# Altium PCB PCB1.PcbDoc
Units mil, origin at the board's own origin, x right, y up, seen from the top; angles counter-clockwise.
Board outline 5155.03 x 4750.03 mil, 2 copper layers (Top Layer, Bottom Layer); 34 components, 44 nets, 159 pads, 28 vias.
Unrouted connection lines stored in the file: 3.
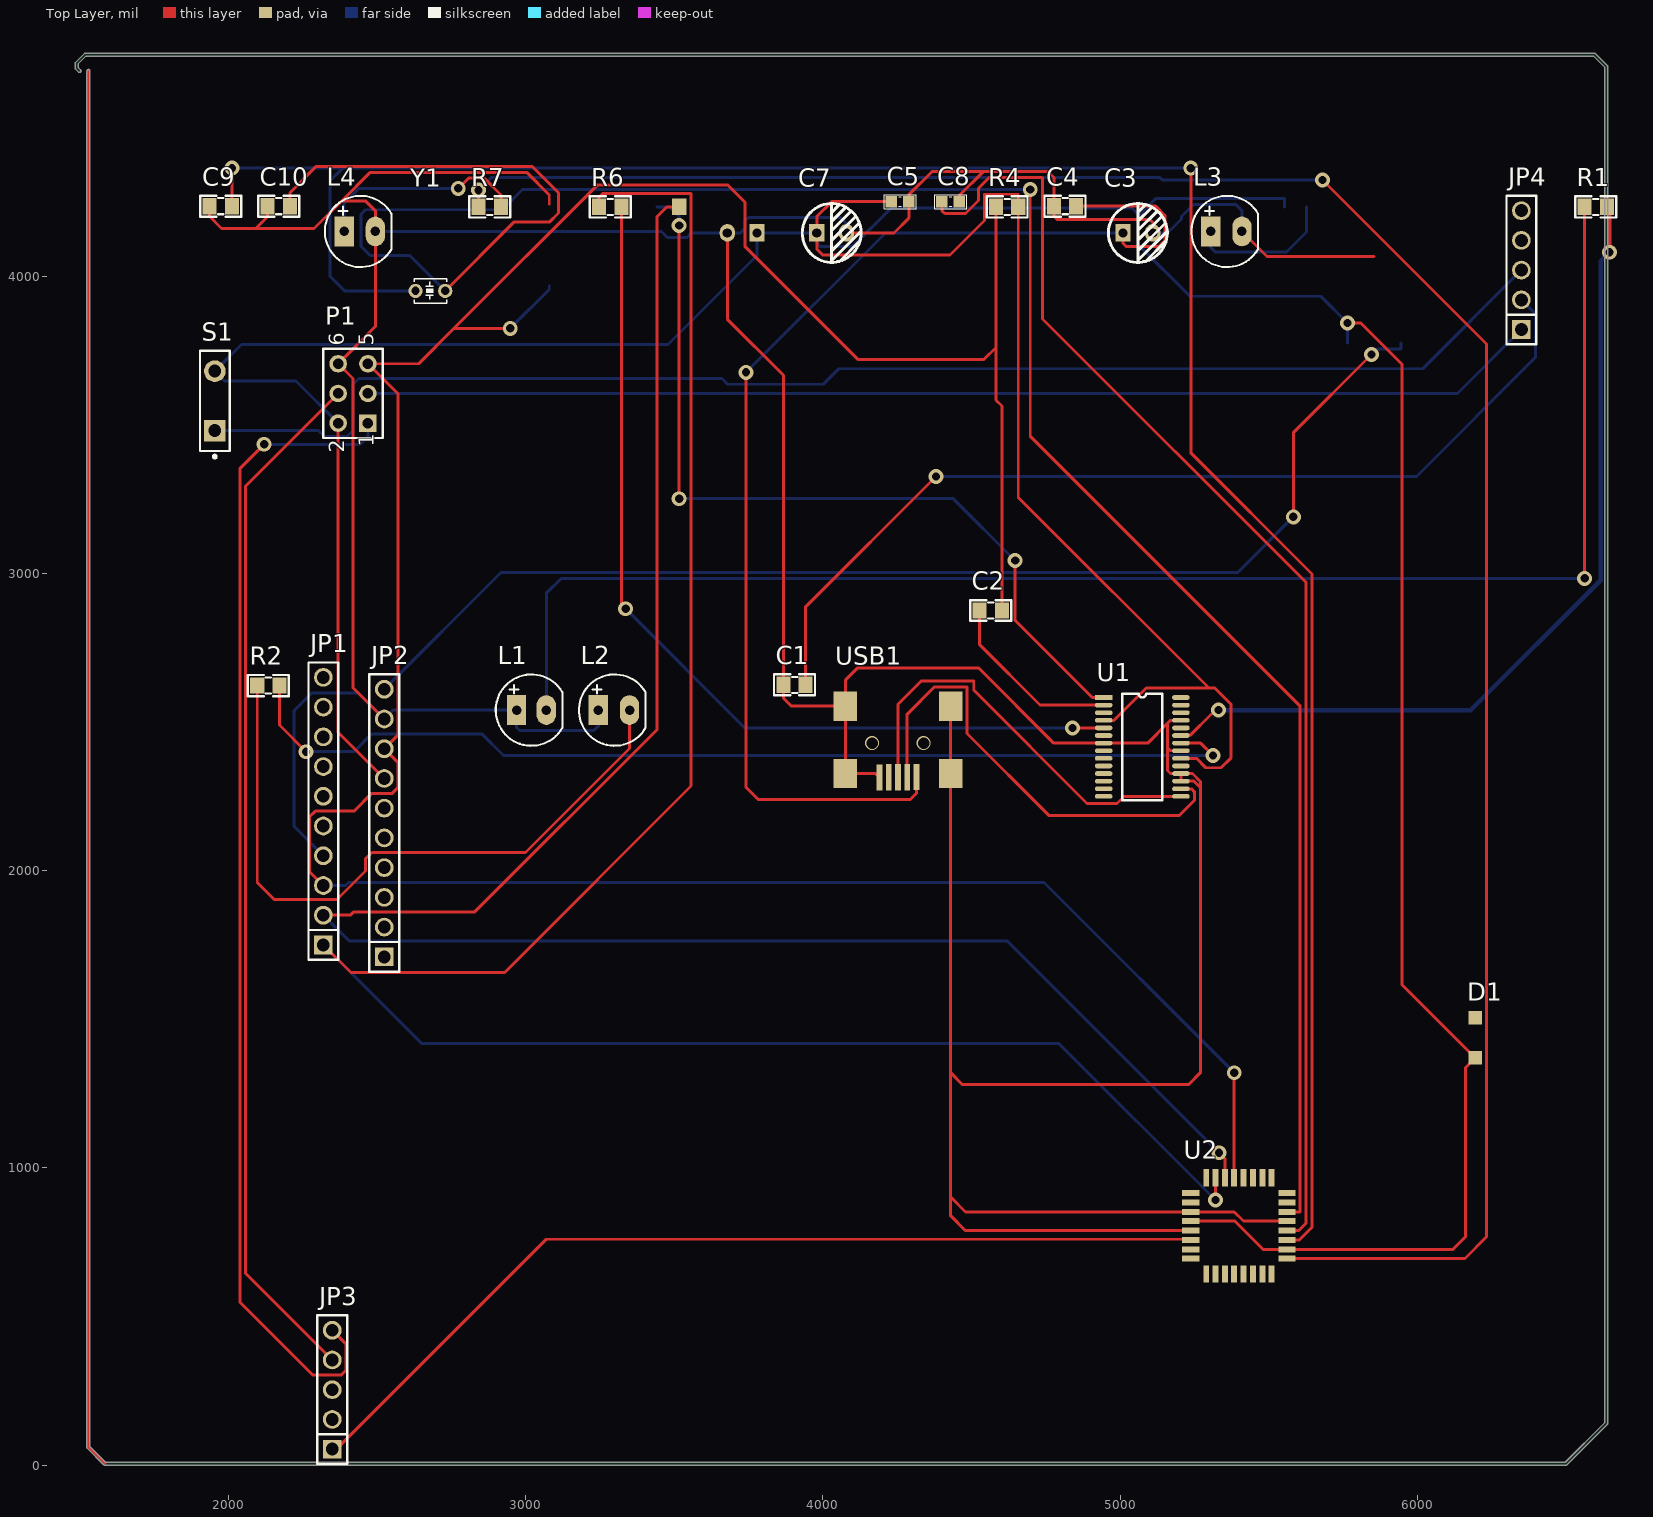
[diagram p0: Top Layer view]
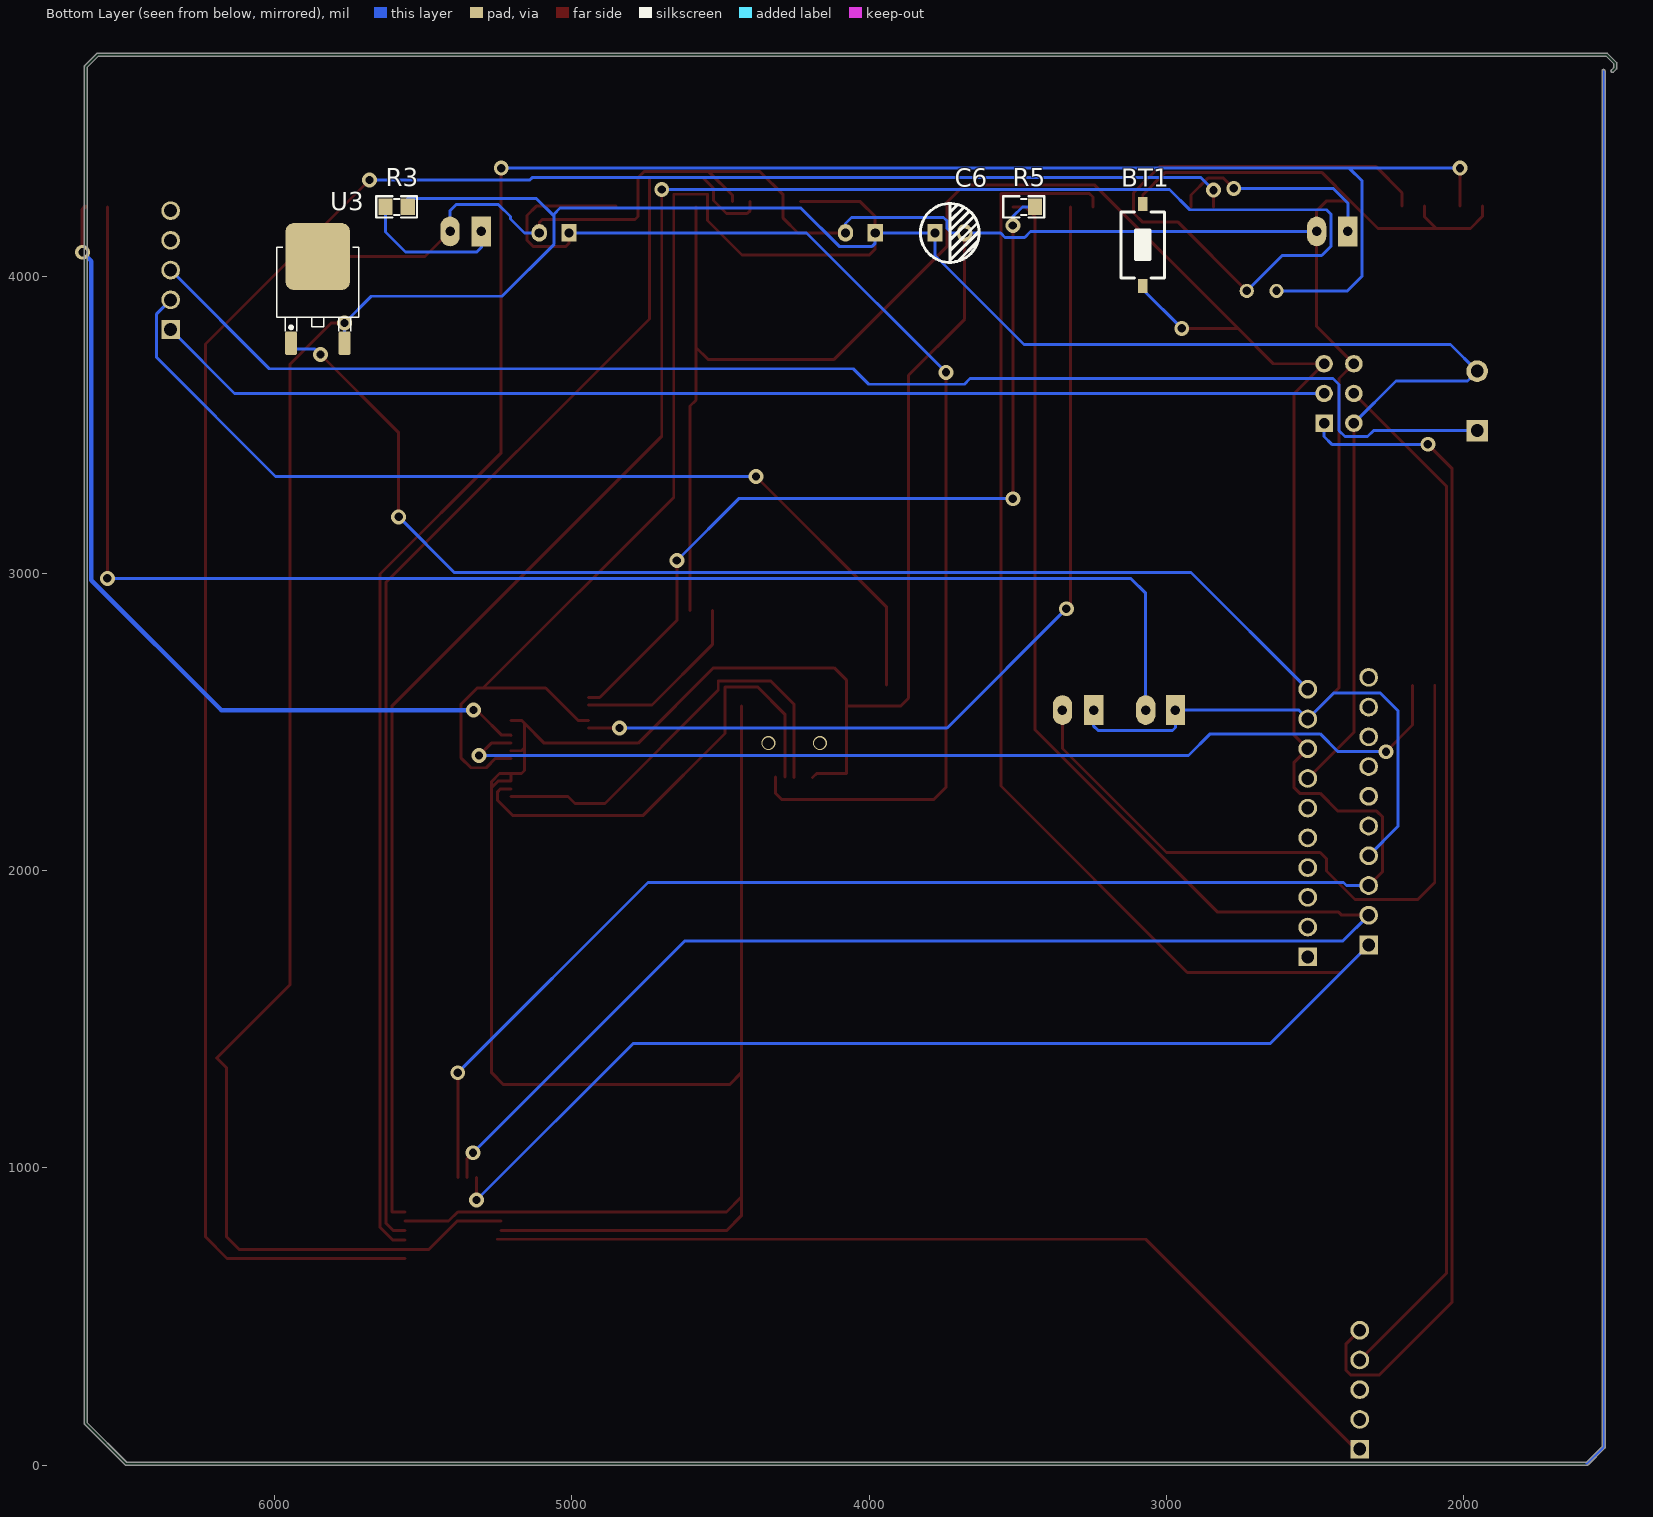
[diagram p1: Bottom Layer view, seen from below]

## Layer stack, top to bottom
Top Solder: solder mask 0.4, Solder Resist, Dk 3.5
Top Layer: signal copper 1.4
Dielectric 1: dielectric 12.6, FR-4, Dk 4.8
Bottom Layer: signal copper 1.4
Bottom Solder: solder mask 0.4, Solder Resist, Dk 3.5

## Board outline
1496.45,4686.45 1486.45,4696.45 cw(c1489.97,4699.99) 1484.98,4700 1484.98,4715 cw(c1490,4715) 1486.47,4718.56 1516.45,4748.55 cw(c1519.99,4745.03) 1520,4750.02 6595,4750.02 cw(c6595,4745) 6598.56,4748.53 6638.55,4708.55 cw(c6635.03,4705.01) 6640.02,4705 6640.02,140 cw(c6635,140) 6638.53,136.44 6503.55,1.45 cw(c6500.01,4.97) 6500,-0.01 1585,-0.01 cw(c1585,5) 1581.44,1.47 1526.45,56.45 cw(c1529.97,59.99) 1524.98,60 1524.98,4690 cw(c1530,4690) 1535.02,4690 1535.02,62.08 1587.08,10.02 6497.92,10.02 6629.98,142.08 6629.98,4702.92 6592.92,4739.98 1522.08,4739.98 1495.02,4712.92 1495.02,4702.08 1503.55,4693.55 cw(c1500,4690) 1505.02,4690 cw(c1500,4690)

## Design rules (kind name [scope] priority, off if disabled: settings)
Clearance [All] p1: gap=10 ignorepadtopadclearanceinfootprint=FALSE except(0: Arc-Hole Track-Hole SMDPad-Hole THPad-Hole Via-Hole Fill-Hole Poly-Hole Region-Hole Text-Hole)
PolygonConnect [All] p1: connectstyle=Relief reliefconductorwidth=10 reliefentries=4 polygonreliefangle="90 Angle" airgapwidth=10
RoomDefinition Sheet1 [InComponentClass('Sheet1')] p1: confinementstyle=ConfineIn formatcopy=TRUE lockcomponents=FALSE outline 7045,1060 14705,1060 14705,2180 7045,2180
RoutingVias [All] p1: holewidth=28 width=50 viastyle="Through Hole" minholewidth=28 minwidth=50 maxholewidth=28 maxwidth=50
SolderMaskExpansion [All] p1: expansion=4 istentingtop=FALSE
Width [All] p1: maxlimit=50 minlimit=10 preferedwidth=10
30 further rules are at their usual default settings.

## Components (designator, comment, footprint, x,y, rotation, side; value= is the part's Value field where it differs from the comment)
BT1 "Nut Nhan 2 Chan SMD 3x6x2.5" "Nut Nhan 2 Chan SMD 3x6x2.5" 3080,4105 r90 bottom
C1 "104" "tu 0805" 3905,2625 r0 top
C2 "104" "tu 0805" 4565,2875 r0 top
C3 "4.7uF" "tu hoa 5mm" 5060,4145 r0 top
C4 "104" "tu 0805" 4815,4235 r0 top
C5 "104" "tu 0603" 4260,4250 r0 top
C6 "4.7uF" "tu hoa 5mm" 3729.01,4145 r180 bottom
C7 "4.7uF" "tu hoa 5mm" 4030,4145 r0 top
C8 "104" "tu 0603" 4430,4250 r0 top
C9 "15pF" "tu 0805" 1975,4235 r0 top
C10 "15pF" "tu 0805" 2170,4235 r0 top
D1 "MBR0520" SOD-123 6195,1370 r90 top
JP1 "JP 1x10 2.54" "JP 1x10 DT" 2320,1750 r90 top
JP2 "JP 1x10 2.54" "JP 1x10 DT" 2525,1710 r90 top
JP3 "JP 1x5 2.54" "JP 1x5 DT" 2350,53.94 r90 top
JP4 "JP 1x5 2.54" "JP 1x5 DT" 6350,3820 r90 top
L1 "LED 5mm" LED-5MM-RED 2970,2540 r0 top
L2 "LED 5mm" LED-5MM-Green 3250,2540 r0 top
L3 "LED 5mm" LED-5MM-Green 5310,4150 r0 top
L4 "LED 5mm" LED-5MM-Green 2395,4150 r0 top
P1 "Header 3X2" HDR2X3 2470,3505 r90 top
R1 "680R" "tro smd 0805"#1 6600,4235 r0 top
R2 "680R" "tro smd 0805"#1 2135,2625 r0 top
R3 "680R" "tro smd 0805"#1 5590,4235 r180 bottom
R4 "1k" "tro smd 0805"#1 4620,4235 r0 top
R5 "1k" "tro smd 0805"#2 3480,4235 r180 bottom
R6 "1k" "tro smd 0805"#1 3285,4235 r0 top
R7 "680R" "tro smd 0805"#1 2880,4235 r0 top
S1 "SW-SPST" SPST-2 1955,3580 r90 top
U1 "FT232RL" TSSOP28 4945,2582.36 r0 top
U2 "ATMEGA168-20AU" QFP80P900X900X120-32N 5400,805 r0 top
U3 "78M05 SMD TO252" TO252 5855,3920 r180 bottom
USB1 "USB Mini 5p SMD" "USB Mini 5p SMD" 4250,2450 r0 top
Y1 "16Mhz" "Thach Anh 2 Chan 32,768 KHz" 2630,3950 r90 top value=4Mhz

## Footprints (in the part's own frame and the unit in brackets; to place one, negate y for a bottom-side part, rotate by r counter-clockwise, add the part's x,y. Pads: shape width x height; smd on the part's side, far side on the other; paste and mask are expansions set on the pad)
HDR2X3 [mm] "Connector; Header; 3x2 Position"
  rect 1.5x1.5 hole 0.9: 1(0,0)
  round 1.5 hole 0.9: 2(0,2.54) 3(2.54,0) 4(2.54,2.54) 5(5.08,0) 6(5.08,2.54)
  silkscreen extent -1.27,-1.27 6.35,3.81
"JP 1x5 DT" [mm] "5 pins, 1 row, straight, gold plating"
  rect 1.6x1.6 hole 1.1: 1(0,0)
  round 1.6 hole 1.1: 2(2.54,0) 3(5.08,0) 4(7.62,0) 5(10.16,0)
  silkscreen extent -1.27,-1.27 11.43,1.27, body extent -1.27,-1.27 11.43,1.27, height 8.54
"JP 1x10 DT" [mm] "10 pins, 1 row, straight, gold plating"
  rect 1.6x1.6 hole 1.1: 1(0,0)
  round 1.6 hole 1.1: 2(2.54,0) 3(5.08,0) 4(7.62,0) 5(10.16,0) 6(12.7,0) 7(15.24,0) 8(17.78,0) 9(20.32,0) 10(22.86,0)
  silkscreen extent -1.27,-1.27 24.13,1.27, body extent -1.27,-1.27 24.13,1.27, height 8.54
LED-5MM-Green [mil] "LED 2 PIN, 5 ly , Only colour,pin to pin 100mil"
  rect 65x100 hole 32: 1(-5,0)
  oval 65x100 hole 32: 2(100,0)
  silkscreen extent -70,-120 154,120, body extent -69,-120 145,117, height 339
LED-5MM-RED [mil] "LED 2 PIN, 5 ly , Only colour,pin to pin 100mil"
  rect 65x100 hole 32: 1(0,0)
  oval 65x100 hole 32: 2(100,0)
  silkscreen extent -70,-120 154,120, body extent -65,-119 149,118, height 339
"Nut Nhan 2 Chan SMD 3x6x2.5" [mm] "Switch SMD type"
  rect 1.2x0.8 smd: 1(-3.5,0) 2(3.5,0)
  silkscreen extent -2.82,-1.85 2.82,1.85, body extent -3.05,-1.85 3.05,1.85, height 2.5
QFP80P900X900X120-32N [mil]
  rect 58x20 smd: 1(-162,110) 2(-162,79) 3(-162,47) 4(-162,16) 5(-162,-16) 6(-162,-47) 7(-162,-79) 8(-162,-110) 17(162,-110) 18(162,-79) 19(162,-47) 20(162,-16) 21(162,16) 22(162,47) 23(162,79) 24(162,110)
  rect 20x58 smd: 9(-110,-162) 10(-79,-162) 11(-47,-162) 12(-16,-162) 13(16,-162) 14(47,-162) 15(79,-162) 16(110,-162) 25(110,162) 26(79,162) 27(47,162) 28(16,162) 29(-16,162) 30(-47,162) 31(-79,162) 32(-110,162)
  body extent -177,-177 177,177, height 46
SOD-123 [mil]
  rect 45x45 smd: 1(0,0) 2(135,0)
  body extent -7,-26 137,35, height 55
SPST-2 [mm] "Switch; 2 Leads"
  rect 1.85x1.85 hole 1.1: 1(-2.54,0)
  round 1.85 hole 1.1: 2(2.54,0)
  silkscreen extent -4.89,-1.27 4.28,1.27
"Thach Anh 2 Chan 32,768 KHz" [mil]
  round 48 hole 28: 1(0,0) 2(0,-100)
  silkscreen extent -42,-106 42,5, body extent -120,-105 321,6, height 66
TO252 [mm] "TO252"
  round 0.5 on Mech15: 0(0,0)
  rrect25% 1x2 smd: 1(-2.285,-3.7) 3(2.285,-3.7)
  rrect25% 5.5x5.7 smd: 2(0,3.7)
  silkscreen extent -3.5,-2.7 3.5,4.5, body extent -3.3,-3.95 3.3,5.76, height 2.31
"tro smd 0805"#1 [mm]
  rect 1.2x1.4 smd: 1(-0.946,-0.061) 2(0.954,-0.061)
  silkscreen extent -1.75,-0.97 1.75,0.84, body extent -1.56,-0.76 1.44,0.64, height 0.53
"tro smd 0805"#2 [mm]
  rect 1.2x1.4 smd far side: 1(-0.946,-0.061)
  rect 1.2x1.4 smd: 2(0.954,-0.061)
  silkscreen extent -1.75,-0.97 1.75,0.84, body extent -1.56,-0.76 1.44,0.64, height 0.53
TSSOP28 [mm]
  rect 1.5x0.4 smd: 1(0,0)
  oval 1.5x0.4 smd: 2(0,-0.65) 3(0,-1.3) 4(0,-1.95) 5(0,-2.6) 6(0,-3.25) 7(0,-3.9) 8(0,-4.55) 9(0,-5.2) 10(0,-5.85) 11(0,-6.5) 12(0,-7.15) 13(0,-7.8) 14(0,-8.45) 15(6.6,-8.45) 16(6.6,-7.8) 17(6.6,-7.15) 18(6.6,-6.5) 19(6.6,-5.85) 20(6.6,-5.2) 21(6.6,-4.55) 22(6.6,-3.9) 23(6.6,-3.25) 24(6.6,-2.6) 25(6.6,-1.95) 26(6.6,-1.3) 27(6.6,-0.65) 28(6.6,0)
  silkscreen extent 1.59,-8.77 5.02,0.33, body extent 0.1,-9.06 6.5,0.64, height 0.95
"tu 0603" [mm] "Chip Capacitor, 2-Leads, Body 1,60x0,80mm, IPC Medium Density"
  rect 1x0.95 smd mask+0.076: 1(-0.75,0) 2(0.75,0)
  silkscreen extent -1.35,-0.58 1.37,0.58, body extent -0.8,-0.4 0.8,0.4, height 0.9
"tu 0805" [mm] "Compoment SMD 80x50mil"
  rect 1.2x1.4 smd: 1(-0.946,-0.003) 2(0.954,-0.003)
  silkscreen extent -1.75,-0.89 1.75,0.89, body extent -1.01,-0.64 1.01,0.63, height 0.61
"tu hoa 5mm" [mm]
  rect 1.3x1.5 hole 0.8: 1(-1.27,0)
  oval 1.3x1.5 hole 0.8: 2(1.27,0)
  silkscreen extent -2.51,-2.51 2.51,2.51, body extent -3.12,-3.18 3.23,3.18, height 14.55
"USB Mini 5p SMD" [mm]
  rect 0.5x2.25 smd: 1(1.651,-3.429) 2(0.864,-3.442) 3(0.076,-3.454) 4(-0.711,-3.467) 5(-1.499,-3.48)
  rect 2x2.5 smd: 5(-4.424,-3.124) 5(-4.42,2.616) 5(4.576,-3.124) 5(4.58,2.616)
  body extent -5.27,-3.8 5.43,5.4, height 3.95

## Part data
C1 C2 C4: library part "Tu 0805 104 50V 10%", "Dán", Chung_Loai=Dán, Don_Vi=Con, Ma_Hang=MH004551, So_Chan=2, Ten_Linh_Kien="Tụ 0805 104-100nF 10% 50V"
C3 C6 C7: library part "Tu Hoa 4.7uF 50V 5x11", "Cắm", Chung_Loai=Cắm, Don_Vi=Con, Ma_Hang=MH001357, So_Chan=2, Ten_Linh_Kien="Tụ Hóa 4.7uF 50V 5x11MM"
C5 C8: library part "Tu 0603 104 50V 10%", "Dán", Chung_Loai=Dán, Don_Vi=Con, Ma_Hang=MH004568, So_Chan=2, Ten_Linh_Kien="Tụ 0603 104-100nF 10% 50V"
C9 C10: library part "Tu 0805 15pF 50V 10%", "Dán", Chung_Loai=Dán, Don_Vi=Con, Ma_Hang=MH004556, So_Chan=2, Ten_Linh_Kien="Tụ 0805 15P 10% 50V"
D1: "Diode Schottky 20V 500mA Surface Mount SOD-123", Package="SOD-123 International Rectifier", Availability=Unavailable, MF="ON Semiconductor", MP=MBR0520, Price=None, SnapEDA_Link=https://www.snapeda.com/parts/MBR0520/ON%20Semiconductor/view-part/564242/?ref=snap
JP1 JP2: library part "JP 1x10 2.54 Duc Thang", "Cắm", Chung_Loai=Cắm, Don_Vi=Con, Ma_Hang=MH000903, Ten_Linh_Kien="Jump Đơn Đực 2.54MM 1x40P Thẳng 11MM"
JP3 JP4: library part "JP 1x5 2.54 Duc Thang", "Cắm", Chung_Loai=Cắm, Don_Vi=Con, Ma_Hang=MH000903, Ten_Linh_Kien="Jump Đơn Đực 2.54MM 1x40P Thẳng 11MM"
L1: library part "LED 5mm Do", "Cắm", Chung_Loai=Cắm, Don_Vi=Con, Ma_Hang=MH008967, Ten_Linh_Kien="Led 5MM Phủ Đỏ (1000c)"
L2 L3 L4: library part "LED 5mm Xanh La", "Cắm", Chung_Loai=Cắm, Don_Vi=Con, Ma_Hang=MH008969, Ten_Linh_Kien="LED 5MM Phủ Xanh (1000c)"
P1: "Header, 3-Pin, Dual row", LatestRevisionDate=17-Jul-2002, LatestRevisionNote="Re-released for DXP Platform.", Publisher="Altium Limited"
R1 R2 R3 R7: library part "Tro 0805 1% 680R", "Dán", Chung_Loai=Dán, Don_Vi=Con, Ma_Hang=MH005487, So_Chan=2, Ten_Linh_Kien="Trở 0805 1% 680R"
R4 R5 R6: library part "Tro 0805 1% 1k", "Dán", Chung_Loai=Dán, Don_Vi=Con, Ma_Hang=MH005468, So_Chan=2, Ten_Linh_Kien="Trở 0805 1% 1k"
S1: "Single-Pole, Single-Throw Switch", LatestRevisionDate=17-Jul-2002, LatestRevisionNote="Re-released for DXP Platform.", PackageDescription="Switch; 2 Leads", PackageReference=SPST-2, Published=24-Mar-1999, Publisher="Altium Limited"
U1: "USB TO UART INTERFACE", Manufacturer="FTDI, Future Technology Devices International Ltd", Manufacturer Part Number="FT232RL R", Package / Case=28-SSOP, Supplier Part Number=768-1007-2-ND, Voltage="3.3 V ~ 5.25 V", Category="Integrated Circuits (ICs)", Features="Serial Interface", FIFO's="256 Byte", Number of Channels=8, Packaging="Tape & Reel (TR)", RoHS="RoHS Compliant", Supplier=Digi-Key, Supplier 1=Digi-Key, Supplier Part Number 1=768-1007-2-ND
U2: "AVR AVRÂ® ATmega Microcontroller IC 8-Bit 20MHz 16KB _8K x 16_ FLASH 32-TQFP _7x7_", Package="TQFP-32 Microchip", Availability=Unavailable, MF=Microchip, MP=ATMEGA168-20AU, Price=None, SnapEDA_Link=https://www.snapeda.com/parts/ATMEGA168-20AU/Microchip/view-part/776709/?ref=snap
U3: "Dán", Chung_Loai=Dán, Don_Vi=Con, Ma_Hang=MH001917, Ten_Linh_Kien="78M05 TO252"
USB1: "USB Type B", Ma_Hang=MH001022, Ten="MiniUSB 5P SMD"
Y1: library part "Thach Anh 2 chan 32,768 Khz", "Crystal For all Crystal 2pin."
BT1: Ma_Hang=MH001036, Ten="Nút Nhấn 2 Chân 3x6x2.5MM SMD"

## Via types
v1: diameter 50, hole 28, Top Layer to Bottom Layer, 26 vias
v2: diameter 47.24, hole 39.37, Top Layer to Bottom Layer, 2 vias

## Nets (pads, with @x,y where several pads share a name; then routed paths per layer and width w, separated by ;. In a path a pad name is that pad's centre, name@x,y a point inside that pad or via, vN(x,y) a via of type N, cw(c..) or ccw(c..) an arc to the next point about the centre after c; other vN are vias at no path point)
+3.3: C1.2 JP4.2 | length 3277.9
  Top Layer w10: C1.2 3942.57,2887.57 v1(4381,3326)
  Bottom Layer w10: v1(4381,3326) 5997,3326 6397,3726 6397,3873 JP4.2
+5: C5.1 C6.1 C7.1 D1.1 JP2.7 P1.2 R3.2 R4.2 S1.2 U1.4 U1.20 U2.4 U2.6 U2.18 U3.3 | length 14993.6
  Top Layer w10: P1.2 2370,2465 JP2.7 ; C5.1 4030,4250 3980,4200 C7.1 3980,4091 4000,4071 4428,4071 4544,4187 4544,4275.17 4657.57,4275.17 R4.2 4657.57,3255.43 5299,2614 ; U1.4 4980,2505.59 5088.41,2614 5299,2614 ; U1.20 5257,2377.64 5288.64,2346 5340,2346 5374,2380 5374,2558.57 5318.57,2614 5299,2614 ; U2.4 5386,821 5481,726 U2.18 6120,726 6162,768 6162,1337 D1.1 5948,1617 5948,3704 5810,3842 v1(5765.04,3842)
  Bottom Layer w10: P1.2 2228,3647 1988,3647 S1.2 2044.53,3769.53 3479.53,3769.53 3779.01,4069.01 C6.1 C7.1 3980,4110 3990,4100 4101,4100 4230,4229 5040,4229 5060,4209 5060,4201 ; R3.2 5552.43,4261 5120,4261 5060,4201 ; U3.3 v1(5765.04,3842) 5675.04,3932 5235,3932 5060,4107 5060,4201
A0: JP2.6
A1: JP2.5
A2: JP2.4
A3: JP2.3
A4: JP2.2
A5: JP2.1
A6: JP4.5
A7: JP4.4
AREF: JP4.3 S1.1 | length 4741.8
  Bottom Layer w10: S1.1 2304,3480 2324,3460 2400,3460 2420,3480 2420,3635 2440,3655 3661,3655 3680,3636 4002,3636 4054.17,3688.17 6018.17,3688.17 JP4.3
D0/RX: JP1.2 R5.1 U2.30 | length 6630.9
  Top Layer w10: JP1.2 2411,1850 2421,1860 2828,1860 3443,2475 3443,4200 3475.61,4232.61 R5.1 ; v1(5333,1051) 5353,1031 U2.30
  Bottom Layer w10: JP1.2 2407,1763 4621,1763 v1(5333,1051)
D1/TX: JP1.1 R6.1 U2.31 | length 7308.4
  Top Layer w10: JP1.1 2413,1657 2930,1657 3557.23,2284.23 3557.23,4278 3260,4278 3247.77,4265.77 R6.1 ; v1(5321,892) U2.31
  Bottom Layer w10: JP1.1 2652,1418 4795,1418 v1(5321,892)
D2: JP1.5
D3: JP1.6
D4: JP1.7
D5: JP1.8
D6: JP1.9
D7: JP1.10
D8: JP3.1
D9: JP3.2
D10: JP3.3
D11/MOSI: JP3.4 P1.4 | length 3500.4
  Top Layer w10: JP3.4 2059,644.94 2059,3294 P1.4
D12/MISO: JP3.5 P1.1 | length 3943.3
  Top Layer w10: v1(2121,3434) 2039,3352 2039,549 2284,304 2381,304 2397,320 2397,406.94 JP3.5
  Bottom Layer w10: v1(2121,3434) 2444,3434 2470,3460 P1.1
D13/SCK: JP4.1 P1.3 | length 3969.1
  Bottom Layer w10: P1.3 6135,3605 JP4.1
NetC2_1: C2.1 U1.2 | length 616.3
  Top Layer w10: C2.1 4527.77,2760 4731,2556.77 U1.2
NetC8_1: C8.1 U2.20 | length 4404.8
  Top Layer w10: C8.1 4400.47,4220 4410.47,4210 4480,4210 4524,4254 4524,4295.17 4560.06,4331.23 4738,4331.23 4739,4330.23 4739,3855.76 5626,2968.76 5626,815 5600,789 U2.20
NetC9_2: C9.2 U2.19 Y1.1 | length 7876.5
  Top Layer w10: C9.2 v1(2012.57,4363) ; v1(5238,4363) 5238,3405.51 5646,2997.51 5646,800 5604,758 U2.19
  Bottom Layer w10: v1(2012.57,4363) 2385,4363 ; Y1.1 2392,3950 2342,4000 2342,4320 2385,4363 ; v1(5238,4363) 2385,4363
NetC10_2: C10.2 U2.22 Y1.2 | length 8177.4
  Top Layer w10: C10.2 2207.57,4280 2296.57,4369 3022,4369 3111,4280 3111,4212 3080,4181 2961,4181 Y1.2 ; v1(4698,4291) 4698,3461 5606,2553 5606,852 U2.22
  Bottom Layer w10: Y1.2 2611,4069 2478,4069 2447,4100 2447,4208 2462,4223 2922.02,4223 2990.02,4291 v1(4698,4291)
NetL1_2: L1.2 R1.1 | length 5156.1
  Top Layer w10: v1(6562.77,2983) R1.1
  Bottom Layer w10: L1.2 3070,2933 3120,2983 v1(6562.77,2983)
NetL2_2: L2.2 R2.1 | length 2301.9
  Top Layer w10: R2.1 2097.77,1960 2154.77,1903 2366,1903 2462,1999 2462,2040 2483,2061 3000,2061 3350,2411 L2.2
NetL3_1: L3.1 R3.1 | length 494.7
  Bottom Layer w10: L3.1 5305,4096 5320,4081 5560,4081 5627.23,4148.23 R3.1
NetL4_1: L4.1 R7.2 | length 720.7
  Top Layer w10: v1(2774,4295) 2808,4329 2861.17,4329 2917.57,4272.59 R7.2
  Bottom Layer w10: L4.1 2390,4245 2440,4295 v1(2774,4295)
NetLabel101: BT1.2 C1.1 C3.2 C4.1 C5.2 C6.2 C7.2 C8.2 C9.1 C10.1 JP1.4 JP2.9 L1.1 L2.1 L3.2 L4.2 P1.6 U1.7 U1.17 U1.18 U1.21 U1.25 U2.3 U2.5 U2.21 U3.2 USB1.5 | length 18793.1
  Top Layer w10: C9.1 1937.77,4200 1977.77,4160 2092.77,4160 ; JP2.9 2420,2615 2420,3655 P1.6 2495,3830 L4.2 2495,4220 2463,4252 2381,4252 ; 3080,4242.8 3080,4273 3004,4349 2478,4349 2381,4252 ; C6.2 3679.01,3854.99 3867.77,3666.23 C1.1 3867.77,2580 3894.77,2553 USB1.5@4076,2553 ; C7.2 4240,4145 4289.53,4194.53 C5.2 4289.53,4273.53 4367.23,4351.23 4540.06,4351.23 ; USB1.5@4191,2313 4177,2327 4075.83,2327 4075.83,2439 4076,2439.17 USB1.5@4076,2553 ; USB1.5@4430.33,2553 4430.33,2439.16 4430.17,2439 4430.17,2327 4430.17,1320 ; C8.2 4459.53,4270.7 4540.06,4351.23 ; C3.2 5110,4180 5100,4190 4787.77,4190 4777.77,4200 C4.1 4777.77,4331.46 4758,4351.23 4540.06,4351.23 ; U1.21 5170,2403.23 5160,2413.23 ; U1.25 5170,2505.59 5160,2495.59 ; U2.5 4480,789 4430.17,838.83 4430.17,901.83 ; L3.2 5494.33,4065.67 5855,4065.67 ; U2.21 5415,821 5384,852 U2.3 4480,852 4430.17,901.83 ; 2092.77,4160 2289,4160 2381,4252 ; 2092.77,4160 2131.89,4199.11 ; 2131.89,4199.11 2132.77,4200 C10.1 2131.89,4199.11 ; USB1.5@4076,2553 4076,2640 4118,2682 4524,2682 4777.18,2428.82 U1.7 5093.23,2428.82 5160,2495.59 ; 4430.17,901.83 4430.17,1320 ; 4430.17,1320 4470.17,1280 5230,1280 5270,1320 5270,2280 ; 5160,2413.23 5160,2495.59 ; 5160,2413.23 5160,2336.46 5170,2326.46 U1.18 ; U1.18 5243.54,2326.46 5270,2300 5270,2280 ; U1.18 U1.17 5249.13,2300.87 5270,2280
  Bottom Layer w10: JP1.4 2222,2148 2222,2539 2280,2597 2438,2597 JP2.9 2555,2540 L1.1 2970,2481 2980,2471 3230,2471 3245,2486 L2.1 ; L4.2 3457.23,4150 3477.23,4130 3543,4130 3558,4145 C6.2 3723,4145 3738,4160 3738,4185 3750,4197 4060,4197 4080,4177 C7.2 ; C3.2 5160,4145 5207,4192 5207,4200 5247,4240 5390,4240 5410,4220 L3.2
NetR1_2: R1.2 U1.23 | length 2905.7
  Top Layer w10: U1.23 5205.94,2455.51 5236.51,2455.51 5306,2525 5306.18,2525 5323.18,2542 v1@5333,2542
  Top Layer w15: v1(5331,2540) v1@5333,2542 ; R1.2 6646.42,4223.76 v1(6646.42,4079.85)
  Bottom Layer w15: v1(5331,2540) 6179.88,2540 6617,2977.12 6617,4050.42 v1(6646.42,4079.85)
NetR2_2: R2.2 U1.22 | length 3491.2
  Top Layer w10: R2.2 2172.57,2489.43 v1(2262,2400) ; U1.22 5271.18,2428.82 v1(5313,2387)
  Bottom Layer w10: v1(2262,2400) 2423,2400 2483,2460 2853,2460 2926,2387 v1(5313,2387)
NetR7_1: R7.1 U2.17 | length 7401.8
  Top Layer w10: v1(2842,4289) 2842,4232.61 R7.1 ; U2.17 6160,695 6233,768 6233,3771 v1(5681,4323)
  Bottom Layer w10: v1(2842,4289) 2884,4331 5134,4331 5142,4323 v1(5681,4323)
NetU1_15: U1.15 USB1.3 | length 1427.6
  Top Layer w10: USB1.3 4253,2560 4330.21,2637.21 4507.88,2637.21 4507.88,2607.12 4889,2226 4990,2226 5013.68,2249.68 U1.15
NetU1_16: U1.16 USB1.2 | length 1584.8
  Top Layer w10: USB1.2 4284,2526.21 4375,2617.21 4485,2617.21 4485,2461 4760,2186 5200,2186 5250,2236 5250,2265.28 5240,2275.28 U1.16
RESET: BT1.1 C2.2 JP1.3 JP2.8 P1.5 R4.1 U2.29 | length 10243.8
  Top Layer w10: JP1.3 2273,1997 2273,2180 2293,2200 2423,2200 2483,2260 2552,2260 2572,2280 2572,2363 JP2.8 2572,2457 2572,3603 P1.5 2641,3705 2760,3824 ; v1(2949,3824) 2760,3824 ; R4.1 4582.77,3760 ; C2.2 4602.57,3562.8 4582.77,3582.6 4582.77,3760 ; U2.29 v1(5384,1320) ; 2760,3824 3243,4307 3680,4307 3738,4249 3738,4100 4118,3720 4542.77,3720 4582.77,3760
  Bottom Layer w10: JP1.3 2395,1950 2405,1960 4744,1960 v1(5384,1320) ; v1(2949,3824) 3080,3955 BT1.1
RX: R5.2 U1.1 | length 2859.8
  Top Layer w10: v1(3517,3251) v1(3517,4170) ; v1(4647,3043) 4647,2842 4906.64,2582.36 U1.1
  Bottom Layer w10: R5.2 3484.39,4232.61 3517,4200 v1(3517,4170) ; v1(3517,3251) 4439,3251 v1(4647,3043)
TX: R6.2 U1.5 | length 3131.7
  Top Layer w10: R6.2 3322.57,2895.43 v1(3337,2881) ; v1(4840,2480) U1.5
  Bottom Layer w10: v1(3337,2881) 3738,2480 v1(4840,2480)
VIN: JP2.10 U3.1 | length 4079.3
  Top Layer w10: v1(5583,3190) 5583,3473 v1(5846,3736)
  Bottom Layer w10: JP2.10 2918,3003 5396,3003 v1(5583,3190) ; v1(5846,3736) 5865,3755 5944.96,3755 U3.1
VUSB: C3.1 C4.2 USB1.1 | length 4094.7
  Top Layer w10: v1(3742,3676) 3742,2280 3782,2240 4295,2240 4315,2260 USB1.1 ; C4.2 5120,4234.87 5151,4203.87 5151,4120 5131,4100 5020,4100 5010,4110 C3.1
  Bottom Layer w10: v1(3742,3676) 4211,4145 C3.1
pads on no net: D1.2 U1.3 U1.6 U1.8 U1.9 U1.10 U1.11 U1.12 U1.13 U1.14 U1.19 U1.24 U1.26 U1.27 U1.28 U2.1 U2.2 U2.7 U2.8 U2.9 U2.10 U2.11 U2.12 U2.13 U2.14 U2.15 U2.16 U2.23 U2.24 U2.25 U2.26 U2.27 U2.28 U2.32 U3.0 USB1.4
copper on no net: | length 3184.1
  Top Layer w10: 2360,50 3070,760 5250,760
  other v2: 4166.39,2428.57 4339.61,2428.57

## Other copper
Multi-Layer:
  lines w10: 1530,4690 1530,60 1585,5

## Silkscreen, mask and mechanical layers (free items; w line width, h text height)
Bottom Solder:
  lines w10: 1500,4690 1490,4700 1490,4715 1520,4745 6595,4745 6635,4705 6635,140 6500,5 1585,5

## Text inside footprints (layer, text, board x,y; h text height)
P1: Top Overlay "6" at 2390,3765 h50 r90; Top Overlay "5" at 2490,3765 h50 r90; Top Overlay "2" at 2390,3405 h50 r90; Top Overlay "1" at 2490,3425 h50 r90